# EAGLE board 3hip4081-hbridge (EAGLE 5.06)
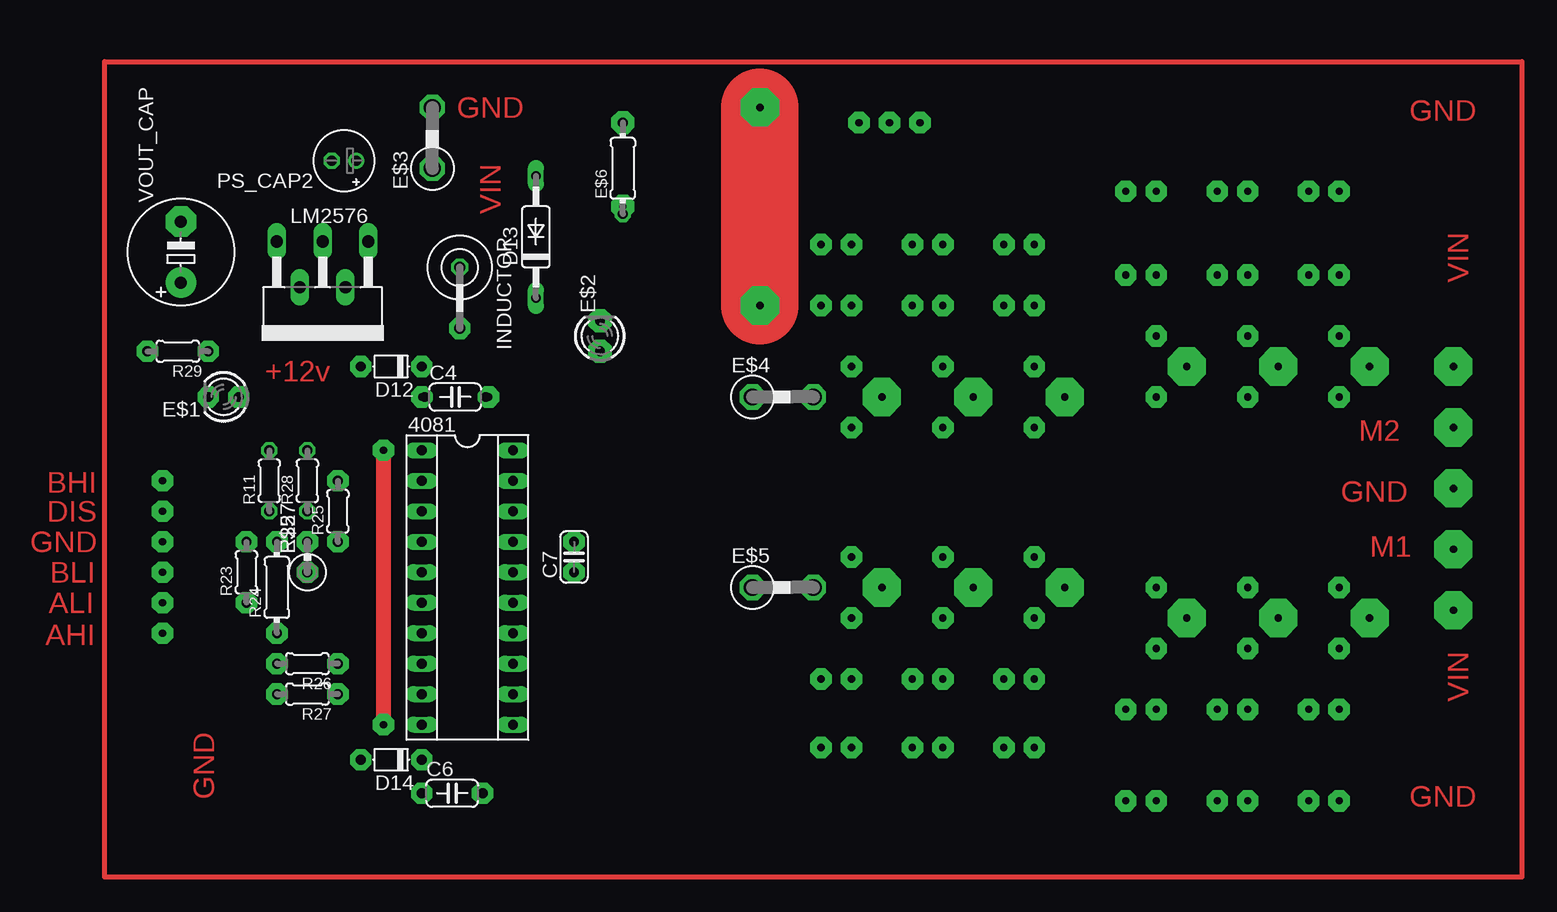
[diagram p0: board, top side]
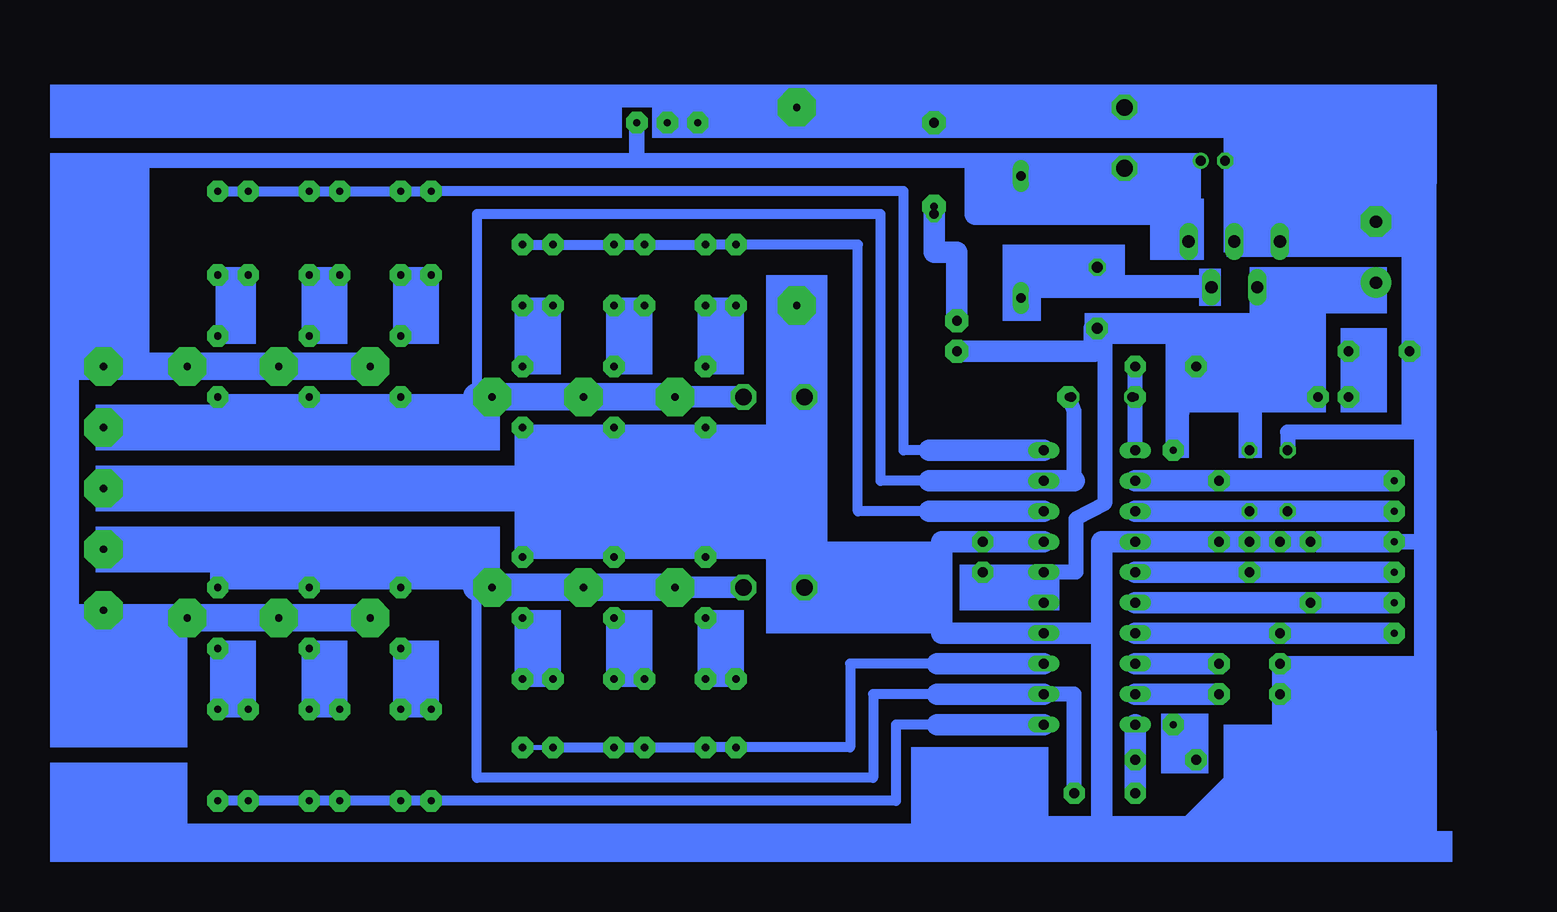
[diagram p1: board, bottom side, seen from below]

No outline drawn. Coordinates in mm, seen from the top.
Copper layers (1*16): Top 0.035mm / dielectric 1.5mm / Bottom 0.035mm
Design rules "default": minimum track width 10mil, minimum drill 24mil, track to track 8mil, track to pad 8mil, pad to pad 8mil, via to via 8mil, smd to smd 8mil, copper to edge 40mil, drill to drill 8mil, minimum pad ring 10mil, minimum via ring 8mil, stop-mask expansion 4mil, vias tented up to drill 0mil, thermal gap 10mil

## Footprints (pad centres in the part's own frame; a part is rotated, then mirrored left to right if it is on the bottom)
SOCKET-20 = drill 0.813 long: 1 -11.43,-3.81; 2 -8.89,-3.81; 3 -6.35,-3.81; 4 -3.81,-3.81; 5 -1.27,-3.81; 6 1.27,-3.81; 7 3.81,-3.81; 8 6.35,-3.81; 9 8.89,-3.81; 10 11.43,-3.81; 11 11.43,3.81; 12 8.89,3.81; 13 6.35,3.81; 14 3.81,3.81; 15 1.27,3.81; 16 -1.27,3.81; 17 -3.81,3.81; 18 -6.35,3.81; 19 -8.89,3.81; 20 -11.43,3.81
C050-024X044 = drill 0.813 octagon: 1 -2.54,0; 2 2.54,0
C025-024X044 = drill 0.813 octagon: 1 -1.27,0; 2 1.27,0
D-5 = drill 0.813 octagon: A 2.54,0; C -2.54,0
C2992 = drill 0.813 long: A 5.08,0; C -5.08,0
LED3MM = drill 0.813 octagon: A -1.27,0; K 1.27,0
C1702-05 = drill 1.397 octagon: A 2.54,0; C -2.54,0
0204/7 = drill 0.813 octagon: 1 -3.81,0; 2 3.81,0
0309V = drill 0.813 octagon: 1 -1.27,0; 2 1.27,0
LBC-SE = drill 0.914 octagon: 1 -2.54,0; 2 2.54,0
CB360 = drill 1.016 long: 1 -3.81,-8.255; 2 -1.905,-4.445; 3 0,-8.255; 4 1.905,-4.445; 5 3.81,-8.255
E2-5 = drill 0.813 pad 1.27 round: + -1.016,0 | drill 0.813 pad 1.27 octagon: - 1.016,0
0204/5 = drill 0.813 octagon: 1 -2.54,0; 2 2.54,0
E5-8,5 = drill 1.016 pad 2.54 round: + -2.54,0 | drill 1.016 pad 2.54 octagon: - 2.54,0

## Placement (x,y rotation side)
4081  [SOCKET-20]  30.23,24.13 270 top
C4  [C050-024X044]  29.21,40.01 0 top
C6  [C050-024X044]  28.96,6.99 0 top
C7  .47uf  [C025-024X044]  39.12,26.67 90 top
D12  [D-5]  23.88,42.55 180 top
D13  [C2992]  35.94,53.34 90 top
D14  [D-5]  23.88,9.78 180 top
E$1  [LED3MM]  9.91,40.01 180 top
E$2  [LED3MM]  41.27,45.09 90 top
E$3  [C1702-05]  27.3,61.59 90 top
E$4  [C1702-05]  56.52,40.01 0 top
E$5  [C1702-05]  56.52,24.13 0 top
E$6  [0204/7]  43.18,59.05 90 top
E$57  [0309V]  16.89,26.67 90 top
INDUCTOR  330uH  [LBC-SE]  29.59,48.26 270 top
LM2576  [CB360]  18.16,44.7 180 top
PS_CAP2  100uF  [E2-5]  19.94,59.69 180 top
R11  [0204/5]  13.72,33.02 90 top
R22  [0309V]  16.89,26.67 90 top
R23  [0204/5]  11.81,25.4 90 top
R24  [0204/7]  14.35,24.13 90 top
R25  [0204/5]  19.43,30.48 90 top
R26  [0204/5]  16.89,17.78 180 top
R27  [0204/5]  16.89,15.24 180 top
R28  [0204/5]  16.89,33.02 90 top
R29  [0204/5]  6.1,43.81 180 top
VOUT_CAP  1000uf  [E5-8,5]  6.35,52.07 90 top

## Library data of the parts
4081 = ic-package
C4 C6 C7 E$6 E$57 PS_CAP2 R11 R22-R29 VOUT_CAP = rcl
D12-D14 E$3-E$5 = diode
E$1 E$2 = led
INDUCTOR = inductors
LM2576 = linear

## Nets
GND2: 4081.4
R24: 4081.5
S$2: 4081.19
S$4: 4081.11
S$10: 4081.18
S$11: 4081.15 4081.16
S$19: 4081.12
S$30: 4081.14 4081.17
S$33: 4081.10
S$34: 4081.1
S$37: INDUCTOR.1
S$41: R11.2
S$43: R28.2
S$76: 4081.2
S$78: 4081.3
S$80: 4081.9
S$81: 4081.8
S$83: 4081.6
S$84: 4081.7

## Tracks (layer width: path | path; a pad name or v marks a point on that pad's centre or on a via)
GND2  (via drill 0.6 pad 1.78)
  Bottom 1.27: v14.35,17.78 v14.35,15.24 14.35,12.06 22.61,3.81 29.21,4.45
  Bottom 1.778: 29.21,4.45 29.21,27.94 4081.4 v19.43,27.94 v16.89,27.94 v14.35,27.94 v11.81,27.94
R24  (via drill 0.6 pad 1.78)
  Bottom 1.778: 4081.5 v16.89,25.4 v4.83,25.4
S$1
  Bottom 1.27: 1.91,59.05 1.91,12.06 14.61,12.06
S$2  (via drill 0.6 pad 1.78)
  Bottom 1.27: 4081.19 31.5,33.02 31.5,38.73 v32,40.01
  Bottom 1.778: 31.5,33.02 43.56,33.02
S$3  (via drill 0.6 pad 1.78)
  Bottom 0.813: 43.18,12.7 46.35,12.7 46.35,6.35 v85.09,6.35 v102.87,6.35
S$4
  Bottom 1.778: 4081.11 42.93,12.7 | 34.04,17.78 42.93,17.78
S$5  (via drill 0.6 pad 3.17)
  other vias: 105.41,42.55
S$6  (via drill 0.6 pad 1.78)
  other vias: 67.94,62.87
S$7  (via drill 0.6 pad 1.78)
  Bottom 0.406: v77.47,10.79 v74.93,10.79
  Bottom 0.813: 43.18,17.78 50.16,17.78 50.16,10.79 v59.69,10.79 v62.23,10.79 v67.31,10.79 v74.93,10.79
S$8  (via drill 0.6 pad 3.17)
  other vias: 97.79,42.55
S$9  (via drill 0.6 pad 1.78)
  other vias: 95.25,40.01
S$10
  Bottom 1.778: 4081.18 43.56,30.48 | 34.04,35.56 43.56,35.56
S$11  (via drill 0.6 pad 1.78)
  Top 1.27: v23.24,12.7 v23.24,35.56
  Bottom 1.016: 4081.16 4081.15 | 15.62,48.9 15.62,45.72 23.24,45.72 | 23.24,45.72 28.96,45.72 | v21.34,42.55 23.24,45.72 | v21.34,42.55 23.24,45.09 | v23.24,35.56 v21.34,42.55
  Bottom 1.27: 40.39,22.86 4081.15 4081.16 | 4081.16 v39.12,25.4 | 4081.16 31.37,25.4 31.37,29.84 28.96,31.11 28.96,45.72 | v23.24,12.7 21.34,12.7 v21.34,9.78 21.34,9.65
S$12  (via drill 0.6 pad 1.78)
  Bottom 0.813: 43.81,35.56 45.72,35.56 45.72,57.15 v85.09,57.15 v102.87,57.15
S$13  (via drill 0.6 pad 1.78)
  other vias: 65.41,62.87
S$14  (via drill 0.6 pad 1.78)
  other vias: 87.63,40.01
S$15  (via drill 0.6 pad 1.78)
  Bottom 0.406: v77.47,42.55 v77.47,47.62
S$16  (via drill 0.6 pad 3.17)
  other vias: 80.01,40.01
S$17  (via drill 0.6 pad 1.78)
  Bottom 0.406: v77.47,26.67 57.15,26.67 57.15,37.47 v77.47,37.47
S$18  (via drill 0.6 pad 1.78)
  Bottom 0.813: 43.81,30.48 49.53,30.48 49.53,52.7 v59.69,52.7 v62.23,52.7 v67.31,52.7 v74.93,52.7 v77.47,52.7
S$19  (via drill 0.6 pad 1.78)
  Bottom 1.27: 4081.12 31.5,15.24 v31.5,6.99
  Bottom 1.778: 4081.12 42.93,15.24
S$20  (via drill 0.6 pad 3.17)
  other vias: 72.39,40.01
S$21  (via drill 0.6 pad 1.78)
  other vias: 69.85,37.47
S$22  (via drill 0.6 pad 3.17)
  other vias: 112.39,27.3
S$23  (via drill 0.6 pad 3.17)
  other vias: 112.39,32.38
S$24  (via drill 0.6 pad 1.78)
  other vias: 62.23,37.47
S$25  (via drill 0.6 pad 3.17)
  other vias: 112.39,37.47
S$26  (via drill 0.6 pad 3.17)
  other vias: 105.41,21.59
S$27  (via drill 0.6 pad 3.17)
  other vias: 112.39,42.55
S$28  (via drill 0.6 pad 3.17)
  other vias: 97.79,21.59
S$29  (via drill 0.6 pad 1.78)
  other vias: 95.25,24.13
S$30  (via drill 0.6 pad 1.78)
  Bottom 0.813: 29.59,3.81 29.59,20.32
  Bottom 1.27: 29.59,3.81 35.94,3.81
  Bottom 1.778: 29.59,20.32 4081.14 42.55,20.32 42.55,27.94 v39.12,27.94 4081.17
S$31  (via drill 0.6 pad 3.17)
  other vias: 112.39,22.23
S$32
  Top 0.406: 0,0.64 0,1.27 | 0,1.27 0,67.94 118.11,67.94 118.11,0 0,0 0,1.27
S$33  (via drill 0.6 pad 1.78)
  Bottom 1.778: v26.42,6.99 v26.42,9.78 4081.10
S$34  (via drill 0.6 pad 1.78)
  Bottom 1.27: 4081.1 v26.42,40.01 | 26.42,40.64 v26.42,40.01 | v26.42,40.01 26.42,39.37 | v26.42,40.01 v26.42,42.55
S$35  (via drill 0.6 pad 1.78)
  other vias: 87.63,24.13
S$36  (via drill 0.6 pad 3.17)
  Bottom 1.27: 40.01,55.24 40.01,59.69 109.22,59.69 109.22,42.55
  Bottom 2.286: v90.17,21.59 115.57,21.59 115.57,42.55 109.22,42.55 v90.17,42.55
S$37
  Bottom 1.016: INDUCTOR.1 29.59,49.53 20.7,49.53
S$38  (via drill 0.6 pad 3.17)
  other vias: 80.01,24.13
S$39  (via drill 0.6 pad 1.78)
  other vias: 29.59,45.72
S$40  (via drill 0.6 pad 3.17)
  Top 6.452: v54.61,47.62 v54.61,64.14
S$41
  Bottom 1.27: R11.2 13.72,37.08 2.41,37.08
S$42
  Bottom 1.016: 21.97,52.07 21.97,55.24
  Bottom 1.778: 21.97,55.24 39.75,55.24
S$43
  Bottom 1.27: 16.89,35.81 R28.2 16.89,38.99
S$44  (via drill 0.6 pad 1.78)
  Bottom 1.778: v4.83,27.94 11.18,27.94
S$45
  Bottom 1.016: 18.16,52.07 18.16,59.05
S$46  (via drill 0.6 pad 1.78)
  other vias: 11.18,40.01
S$47  (via drill 0.6 pad 1.78)
  other vias: 8.64,40.01
S$48  (via drill 0.6 pad 1.78)
  other vias: 8.64,43.81
S$49  (via drill 0.6 pad 1.78)
  other vias: 3.56,43.81
S$50  (via drill 0.6 pad 1.78, 0.6 pad 1.93, 0.6 pad 3.17)
  Bottom 0.406: 81.28,24.13 v102.87,24.13
  Bottom 0.813: 43.18,15.24 48.26,15.24 48.26,8.26 81.28,8.26 81.28,24.13
  Bottom 1.778: v59.05,24.13 v64.77,24.13
  Bottom 2.286: v64.77,24.13 81.28,24.13
S$51  (via drill 0.6 pad 3.17)
  other vias: 72.39,24.13
S$52  (via drill 0.6 pad 1.78)
  other vias: 69.85,26.67
S$53  (via drill 0.6 pad 1.93)
  other vias: 43.18,62.87
S$54  (via drill 0.6 pad 1.78, 0.6 pad 1.93, 0.6 pad 3.17)
  Bottom 0.406: 81.28,40.01 v102.87,40.01
  Bottom 0.813: 43.81,33.02 47.62,33.02 47.62,55.24 81.28,55.24 81.28,40.01
  Bottom 1.778: v59.05,40.01 v64.77,40.01
  Bottom 2.286: v64.77,40.01 81.28,40.01
S$55  (via drill 0.6 pad 1.78)
  other vias: 62.23,26.67
S$56  (via drill 0.6 pad 1.93)
  Bottom 1.778: v41.27,46.35 41.27,52.07 43.18,52.07 v43.18,55.88
S$57  (via drill 0.6 pad 1.93)
  Bottom 1.778: v41.27,43.81 29.84,43.81 29.84,45.72 29.21,45.72
S$58  (via drill 0.6 pad 1.78)
  other vias: 62.87,62.87
S$60  (via drill 0.6 pad 1.78)
  other vias: 69.85,52.7
S$63  (via drill 0.6 pad 1.78)
  other vias: 69.85,10.79
S$65  (via drill 0.6 pad 1.78)
  Bottom 0.406: v77.47,21.59 v77.47,16.51 v74.93,16.51
S$66  (via drill 0.6 pad 1.78)
  Bottom 0.406: v69.85,21.59 v69.85,16.51 v67.31,16.51
S$67  (via drill 0.6 pad 1.78)
  Bottom 0.406: v62.23,21.59 v62.23,16.51 v59.69,16.51
S$69  (via drill 0.6 pad 1.78)
  Bottom 0.406: v62.23,42.55 v62.23,47.62 v59.69,47.62
S$70  (via drill 0.6 pad 1.78)
  Bottom 0.406: v69.85,42.55 v69.85,47.62 v67.31,47.62
S$73  (via drill 0.6 pad 1.78)
  other vias: 87.63,13.97
S$74  (via drill 0.6 pad 1.78)
  other vias: 95.25,13.97
S$75  (via drill 0.6 pad 1.78)
  other vias: 102.87,13.97
S$76  (via drill 0.6 pad 1.78)
  Bottom 1.778: 4081.2 v19.43,33.02 v4.83,33.02
S$77  (via drill 0.6 pad 1.78)
  other vias: 102.87,50.16
S$78  (via drill 0.6 pad 1.78)
  Bottom 1.778: v4.83,30.48 4081.3
S$79  (via drill 0.6 pad 1.78)
  other vias: 95.25,50.16
S$80  (via drill 0.6 pad 1.78)
  Bottom 1.778: v19.43,15.24 4081.9
S$81  (via drill 0.6 pad 1.78)
  Bottom 1.778: v19.43,17.78 4081.8
S$82  (via drill 0.6 pad 1.78)
  other vias: 87.63,50.16
S$83  (via drill 0.6 pad 1.78)
  Bottom 1.778: 4081.6 v11.81,22.86 v4.83,22.86
S$84  (via drill 0.6 pad 1.78)
  Bottom 1.778: 4081.7 v14.35,20.32 v4.83,20.32
S$85  (via drill 0.6 pad 1.78)
  other vias: 87.63,57.15
S$86  (via drill 0.6 pad 1.78)
  other vias: 95.25,57.15
S$88  (via drill 0.6 pad 1.78)
  other vias: 100.33,57.15
S$89  (via drill 0.6 pad 1.78)
  Bottom 0.406: v100.33,50.16 102.87,50.16 v102.87,45.09
S$90  (via drill 0.6 pad 1.78)
  Bottom 0.406: v92.71,50.16 95.25,50.16 v95.25,45.09
S$91  (via drill 0.6 pad 1.78)
  other vias: 92.71,57.15
S$92  (via drill 0.6 pad 1.78)
  Bottom 0.406: v85.09,50.16 87.63,50.16 v87.63,45.09
S$95  (via drill 0.6 pad 1.78)
  other vias: 95.25,6.35
S$96  (via drill 0.6 pad 1.78)
  other vias: 87.63,6.35
S$97  (via drill 0.6 pad 1.78)
  other vias: 100.33,6.35
S$98  (via drill 0.6 pad 1.78)
  other vias: 92.71,6.35
S$100  (via drill 0.6 pad 1.78)
  Bottom 0.406: v85.09,13.97 87.63,13.97 v87.63,19.05
S$101  (via drill 0.6 pad 1.78)
  Bottom 0.406: v92.71,13.97 95.25,13.97 v95.25,19.05
S$102  (via drill 0.6 pad 1.78)
  Bottom 0.406: v100.33,13.97 102.87,13.97 v102.87,19.05
S$103  (via drill 0.6 pad 1.78)
  Bottom 0.406: 77.47,47.62 v74.93,47.62
(copper drawn outside any net)
  shapes: Bottom area x78

## Text on the board
Top: GND | GND | VIN | VIN | +12v | M2 | GND | BHI | DIS | GND | M1 | BLI | ALI | AHI | VIN | GND | GND